# Altium PCB ATRACK_KP_V1.PcbDoc (part 1 of 2)
Units mm, origin at the board's own origin, x right, y up, seen from the top; angles counter-clockwise.
Board outline 132 x 70 mm, 2 copper layers (TopLayer, BottomLayer); 246 components, 174 nets, 752 pads, 172 vias.
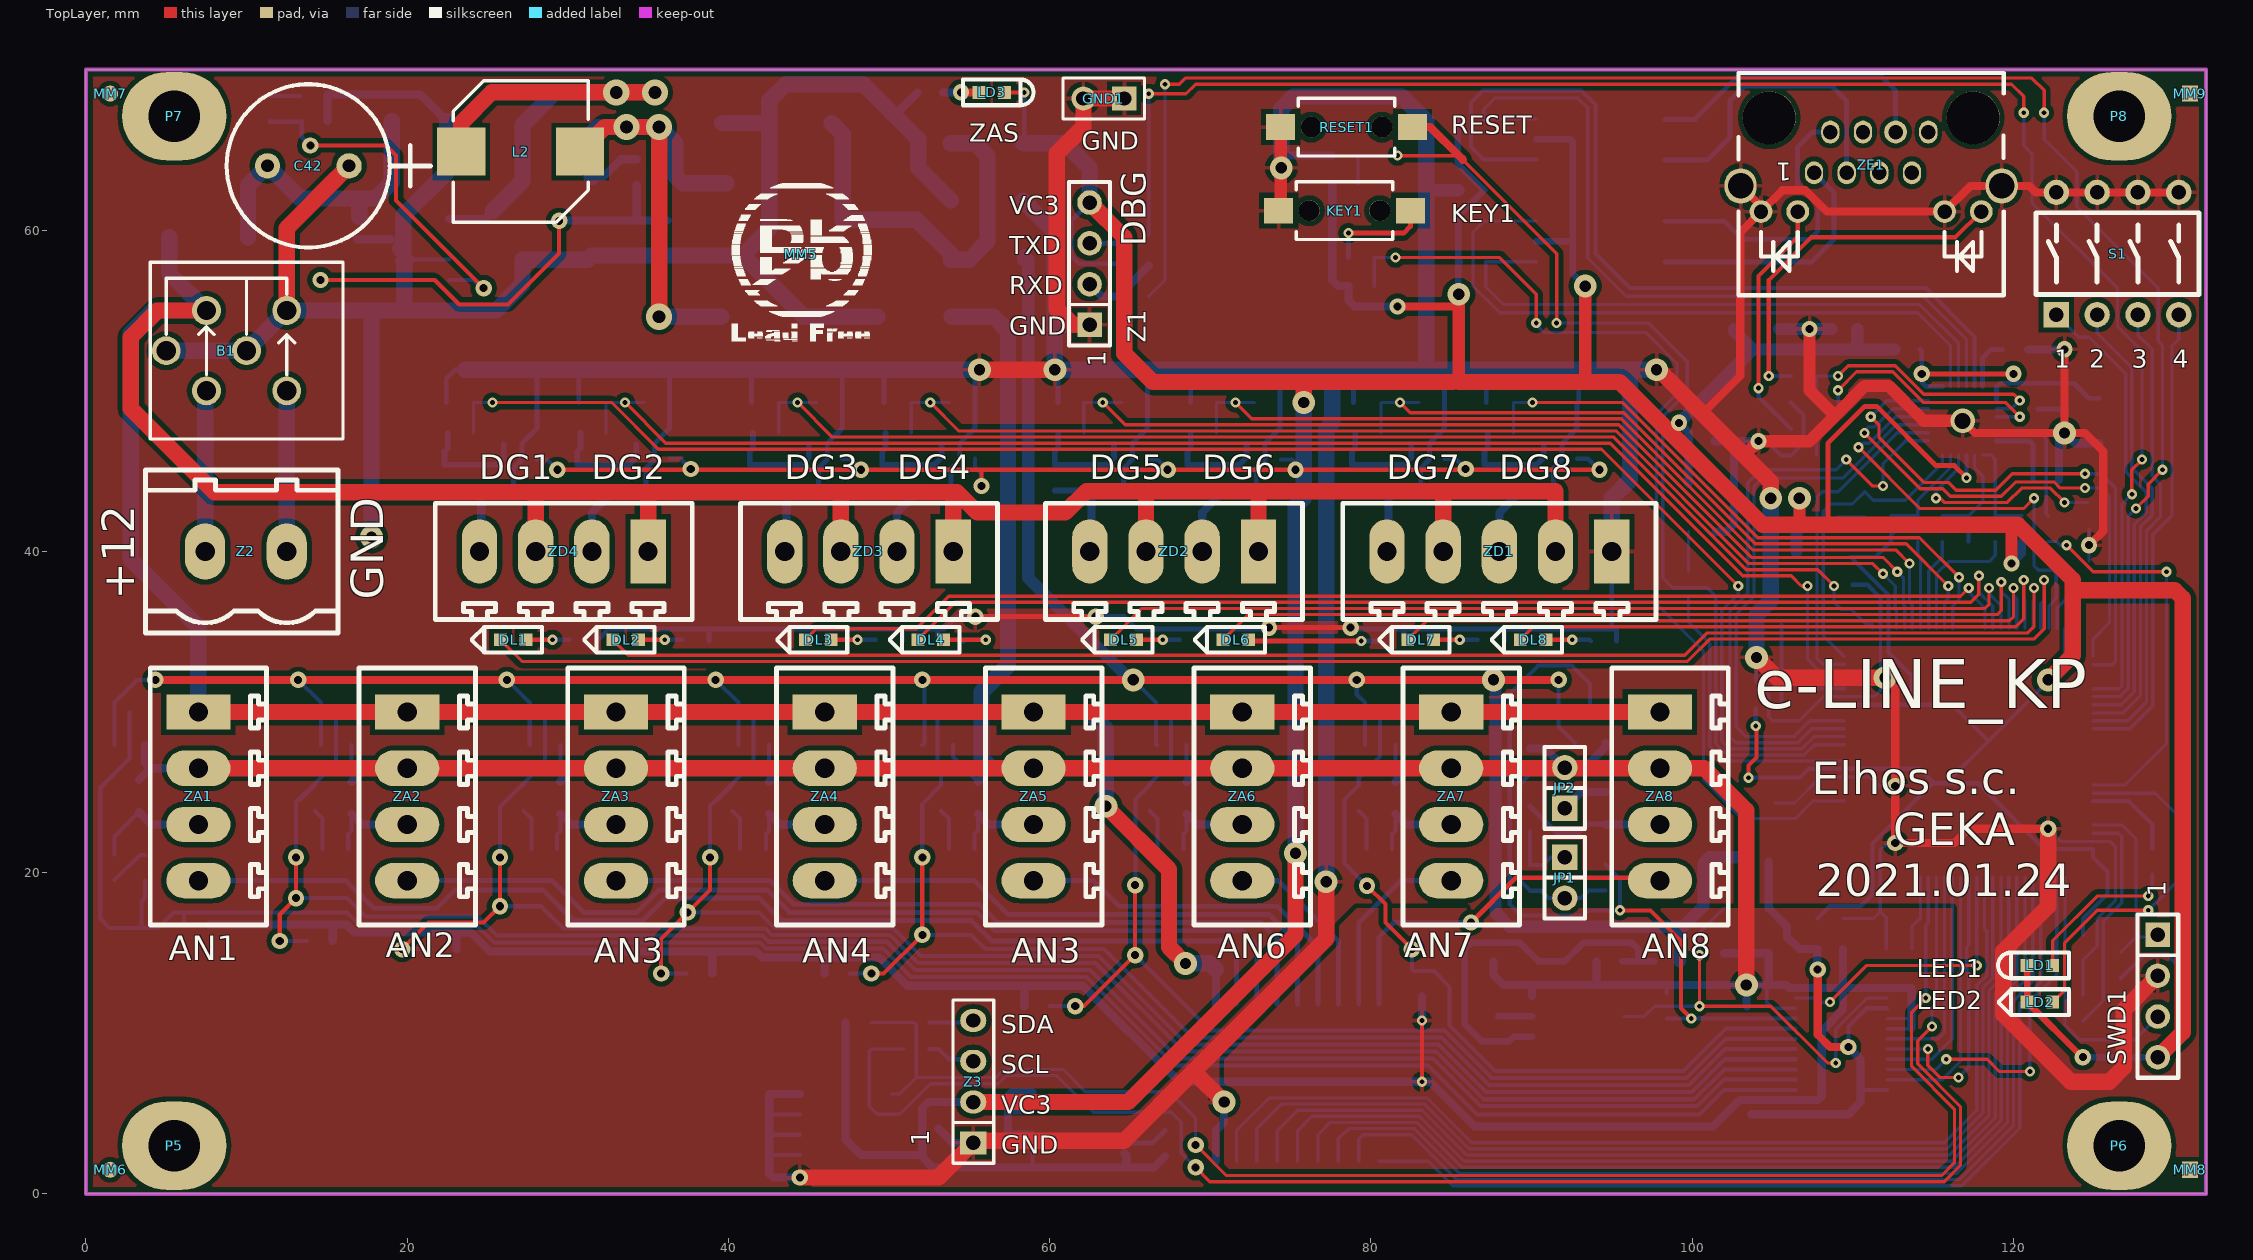
[diagram p0: TopLayer view]
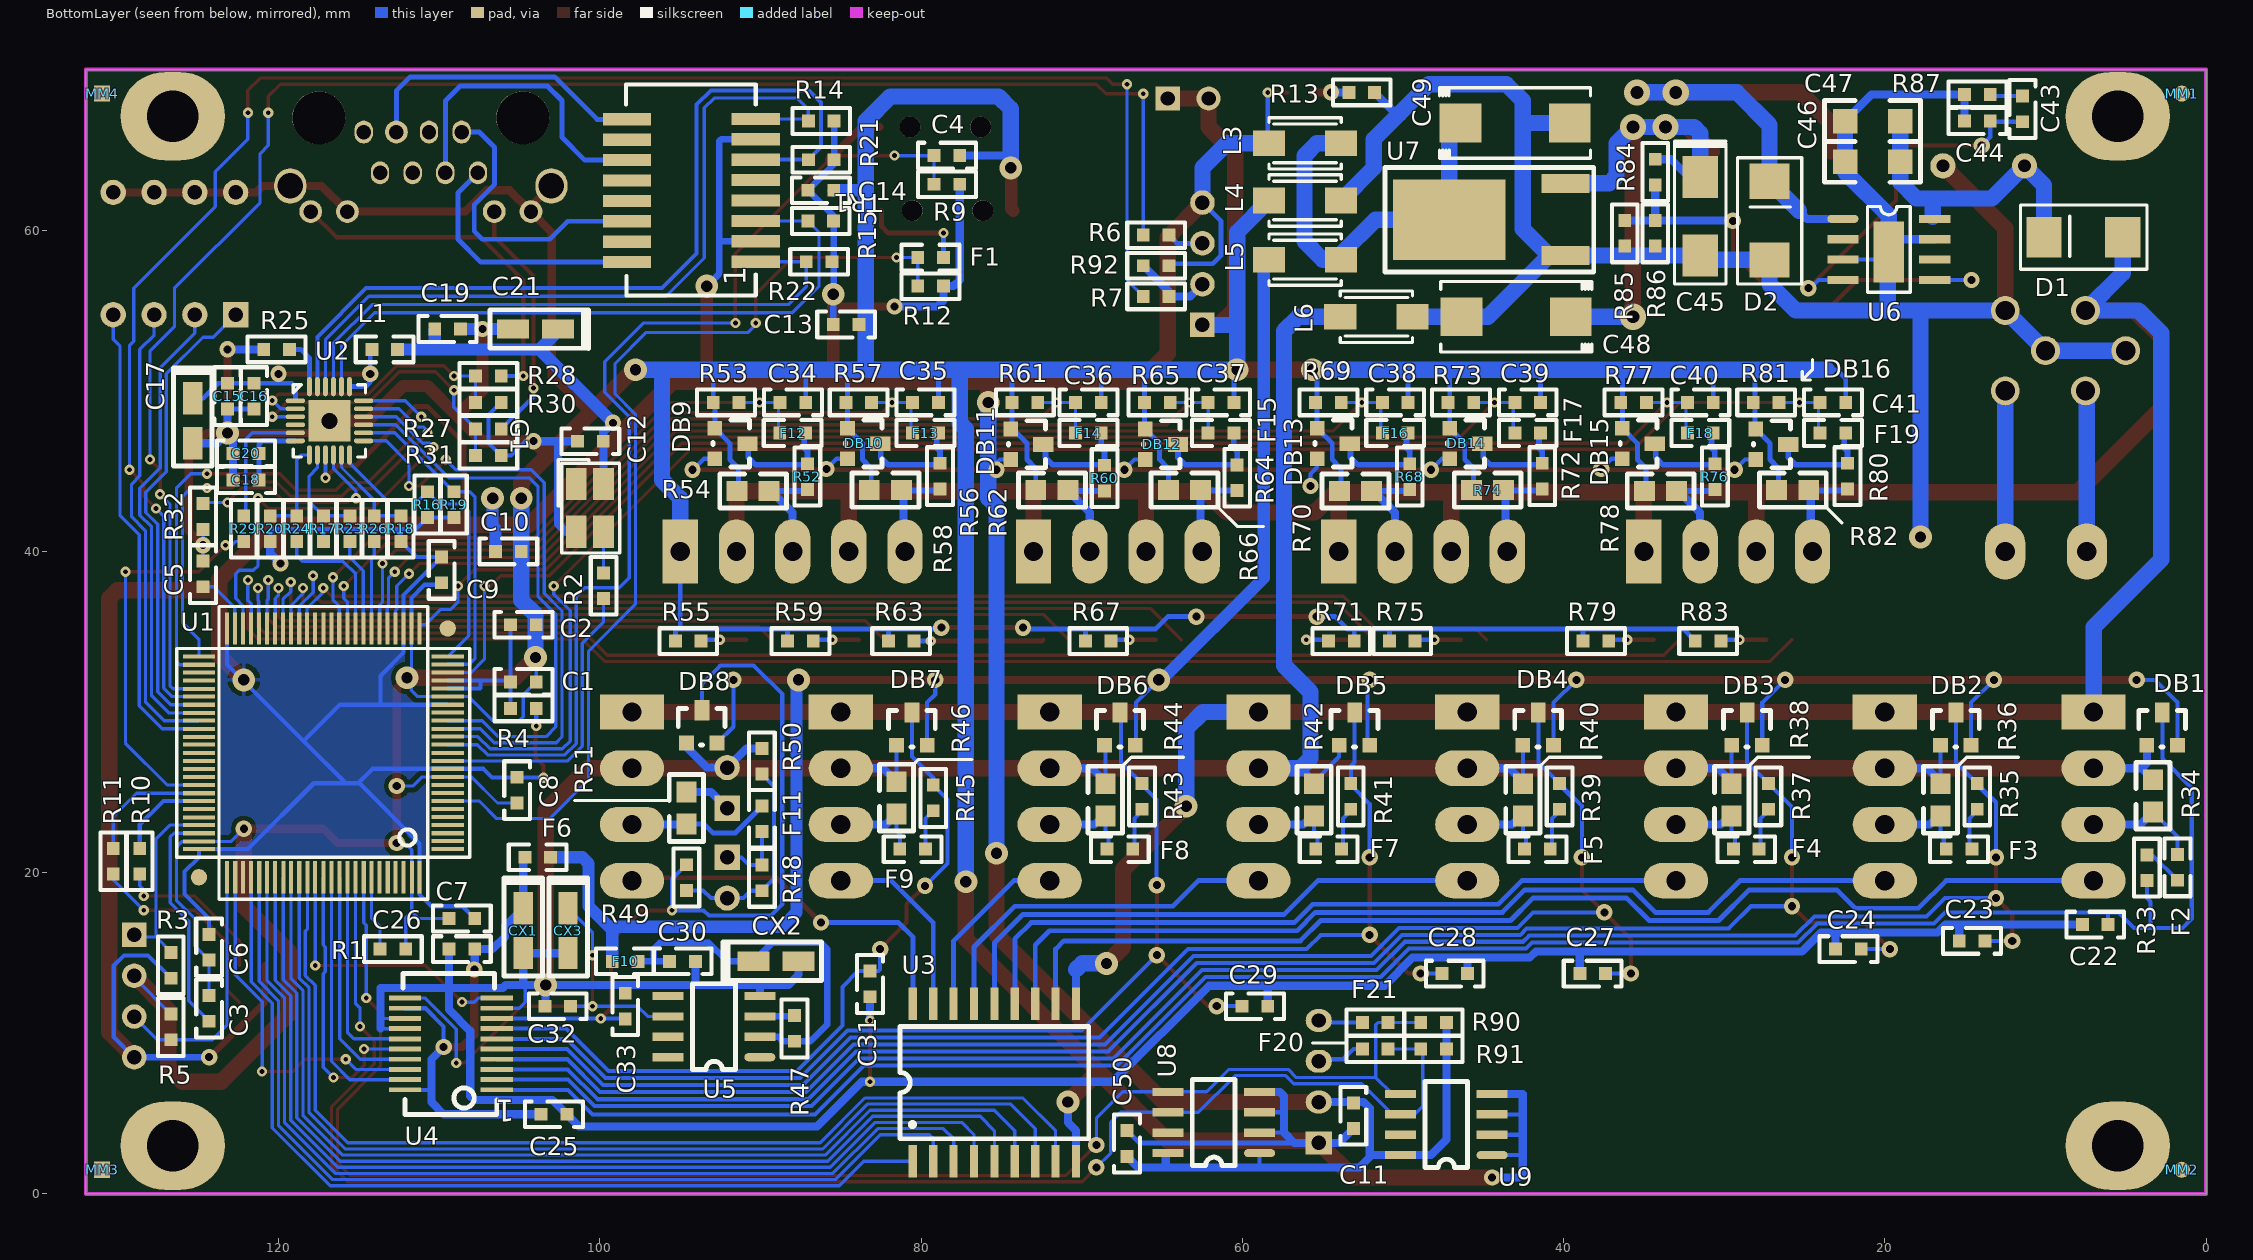
[diagram p1: BottomLayer view, seen from below]

## Layer stack, top to bottom
TopLayer: signal copper 0.0356
Dielectric: core 0.32, FR-4, Dk 4.8
BottomLayer: signal copper 0.0356

## Board outline
0,0 0,70 132,70 132,0

## Design rules (kind name [scope] priority, off if disabled: settings)
Clearance Clearance_Polygon [inPolygon] p1: gap=0.305
Clearance Clearance_1 [not (inPolygon)] p2: gap=0.178
Clearance Clearance_Mocowanie [(InComponentClass('Mocowanie'))] p3: gap=0.508
DiffPairsRouting [All] p1: maxlimit=0.254 minlimit=0.254 mostfreqgap=0.254 maxuncoupledlength=12.7
FabricationTestPointUsage TestPointUsage [All] p1: valid=0 allowmultiple=FALSE
FabricationTestpoint Testpoint [All] p1: side=3 testpointundercomponent=TRUE minsize=1.016 maxsize=2.54 preferedsize=1.524 minholesize=0.508 maxholesize=1.016 preferedholesize=0.813 testpointgrid=0.025 allowsidetop=TRUE allowsidebottom=TRUE usegrid=TRUE gridtolerance=0
HoleSize [All] p1: absolutevalues=TRUE maxlimit=5.08 minlimit=0.3 maxpercent=80.000 minpercent=20.000
MatchedLengths "Schematic Matched Net Lengths_1" [InNet('TD_P')] p1: tolerance=7.62 checknetsindiffpair=TRUE checkdiffpairvsdiffpair=TRUE checkothers=TRUE
MatchedLengths "Schematic Matched Net Lengths" [InNet('RD_N')] p2: tolerance=7.62 checknetsindiffpair=TRUE checkdiffpairvsdiffpair=TRUE checkothers=TRUE
PolygonConnect [All] p1: connectstyle=Relief reliefconductorwidth=0.254 reliefentries=4 polygonreliefangle="90 Angle"
RoutingVias [All] p1: holewidth=0.508 width=1.016 viastyle="Through Hole" minholewidth=0.305 minwidth=0.635 maxholewidth=1.27 maxwidth=2.54
SilkscreenOverComponentPads [All] p1: minsilkscreentomaskgap=0.254
SolderMaskExpansion [All] p1: expansion=0.102
Width [All] p1: maxlimit=5.08 minlimit=0.203 preferedwidth=0.508
23 further rules are at their usual default settings.

## Classes and differential pairs
net class ETHERNET: ERX+ ERX- ETH9 ETH10 ETH11 ETH12 ETH13 ETH14 ETH15 ETH16 ETX+ ETX-
differential pair TD: +TD_P -TD_N
differential pair RD: +RD_P -RD_N

## Components (designator, comment, footprint, x,y, rotation, side; value= is the part's Value field where it differs from the comment)
B1 "BNX002" BNX002 16,58 r0 top
C1 "2u2" 0603C 105.664,31.877 r0 bottom
C2 "100n" 0603C 105.664,35.433 r0 bottom
C3 "2u2" 0603C 124.333,12.446 r90 bottom
C4 "10n" 0603C 79.297,64.643 r0 bottom
C5 "2u2" 0603C 124.714,39.497 r90 bottom
C6 "100n" 0603C 124.333,16.256 r90 bottom
C7 "100n" 0603C 107.696,17.145 r180 bottom
C8 "100n" 0603C 105.156,26.035 r90 bottom
C9 "100n" 0603C 109.855,39.751 r90 bottom
C10 "100n" 0603C 106.602,40 r0 bottom
C11 "100n" 0603C 53.086,5.764 r90 bottom
C12 "100n" 0603C 99.695,46.863 r180 bottom
C13 "100nF" 0603C 83.771,54.129 r180 bottom
C14 "100nF" 0603C 85.344,62.484 r180 bottom
C15 "100nF" 0603C 123.19,48.768 r270 bottom
C16 "100nF" 0603C 121.539,48.768 r270 bottom
C17 "10uF/6v3" CAP_A 125.349,46.736 r90 bottom
C18 "470pF" 0603C 122.936,44.45 r0 bottom
C19 "100nF" 0603C 108.585,53.848 r180 bottom
C20 "2.2uF" 0603C 122.936,46.101 r0 bottom
C21 "10uF/6v3" CAP_A 105.41,53.848 r180 bottom
C22 "100n" 0603C 5.996,16.764 r180 bottom
C23 "100n" 0603C 13.667,15.748 r180 bottom
C24 "100n" 0603C 21.363,15.24 r180 bottom
C25 "100n" 0603C 103.759,4.953 r0 bottom
C26 "100n" 0603C 107.696,15.24 r180 bottom
C27 "100n" 0603C 37.289,13.716 r180 bottom
C28 "100n" 0603C 47.674,13.716 r0 bottom
C29 "100n" 0603C 60.12,11.684 r0 bottom
C30 "100n" 0603C 95.758,14.478 r0 bottom
C31 "100n" 0603C 83.185,13.97 r90 bottom
C32 "100n" 0603C 101.727,11.684 r180 bottom
C33 "100n" 0603C 98.425,10.795 r270 bottom
C34 "100n" 0603C 88.885,49.276 r0 bottom
C35 "100n" 0603C 80.63,49.276 r0 bottom
C36 "100n" 0603C 70.485,49.276 r0 bottom
C37 "100n" 0603C 62.23,49.276 r0 bottom
C38 "100n" 0603C 51.385,49.276 r0 bottom
C39 "100n" 0603C 43.13,49.276 r0 bottom
C40 "100n" 0603C 32.385,49.276 r0 bottom
C41 "100n" 0603C 24.13,49.276 r0 bottom
C42 "1000uF/25V" RB-.2/.4 16.383,64.008 r0 top
C43 "22nF" 0603C 11.43,68.453 r90 bottom
C44 "470p" 0603C 13.335,66.802 r180 bottom
C45 "100uF/6v3" CAP_C 31.496,58.42 r90 bottom
C46 "4u7/25V" 1206 22.479,64.262 r180 bottom
C47 "4u7/25V" 1206 22.479,66.802 r180 bottom
C48 "470uF/16V" CAP_D 46.355,54.61 r180 bottom
C49 "470uF/16V" CAP_D 39.624,66.675 r0 bottom
C50 "100nF" 0603C 67.183,2.237 r270 bottom
CX1 "10u" CAP_A 104.775,14.986 r90 bottom
CX2 "10u" CAP_A 87.63,14.478 r0 bottom
CX3 "10u" CAP_A 101.981,14.986 r90 bottom
D1 "MB1" RD5 5.588,59.563 r180 bottom
D2 "SK26" RD5 27.178,58.547 r270 bottom
DB1 "BAV99" SOT-23 3.683,27.94 r0 bottom
DB2 "BAV99" SOT-23 16.534,27.94 r0 bottom
DB3 "BAV99" SOT-23 29.534,27.94 r0 bottom
DB4 "BAV99" SOT-23 42.534,27.94 r0 bottom
DB5 "BAV99" SOT-23 53.975,27.94 r0 bottom
DB6 "BAV99" SOT-23 68.58,27.94 r0 bottom
DB7 "BAV99" SOT-23 81.534,27.94 r0 bottom
DB8 "BAV99" SOT-23 94.615,28.067 r0 bottom
DB9 "BAV99" SOT-23 92.844,47.674 r90 bottom
DB10 "BAV99" SOT-23 84.589,47.674 r90 bottom
DB11 "BAV99" SOT-23 74.422,47.625 r90 bottom
DB12 "BAV99" SOT-23 66.04,47.625 r90 bottom
DB13 "BAV99" SOT-23 55.344,47.674 r90 bottom
DB14 "BAV99" SOT-23 47.089,47.674 r90 bottom
DB15 "BAV99" SOT-23 36.344,47.674 r90 bottom
DB16 "BAV99" SOT-23 28.04,47.625 r90 bottom
DL1 "" 0603DR 27.5,34.5 r0 top locked
DL2 "" 0603DR 34.5,34.5 r0 top locked
DL3 "" 0603DR 46.5,34.5 r0 top locked
DL4 "" 0603DR 53.5,34.5 r0 top locked
DL5 "" 0603DR 65.5,34.5 r0 top locked
DL6 "" 0603DR 72.5,34.5 r0 top locked
DL7 "" 0603DR 84,34.5 r0 top locked
DL8 "" 0603DR 91,34.5 r0 top locked
F1 "BLM18BB141SN1D" 0603L 78.513,58.293 r0 bottom
F2 "BLM21A102SPT" 0603L 1.778,19.431 r90 bottom
F3 "BLM21A102SPT" 0603L 14.478,21.463 r0 bottom
F4 "BLM21A102SPT" 0603L 27.729,21.463 r0 bottom
F5 "BLM21A102SPT" 0603L 40.729,21.463 r0 bottom
F6 "BLM21A102SPT" 0603L 104.775,20.955 r180 bottom
F7 "BLM21A102SPT" 0603L 53.729,21.463 r0 bottom
F8 "BLM21A102SPT" 0603L 66.729,21.463 r0 bottom
F9 "BLM21A102SPT" 0603L 79.629,21.463 r0 bottom
F10 "BLM21A102SPT" 0603L 97.536,14.478 r0 bottom
F11 "BLM21A102SPT" 0603L 89.916,22.452 r90 bottom
F12 "BLM21A102SPT" 0603L 88.9,47.371 r180 bottom
F13 "BLM21A102SPT" 0603L 80.63,47.371 r180 bottom
F14 "BLM21A102SPT" 0603L 70.485,47.371 r180 bottom
F15 "BLM21A102SPT" 0603L 62.23,47.371 r180 bottom
F16 "BLM21A102SPT" 0603L 51.385,47.371 r180 bottom
F17 "BLM21A102SPT" 0603L 43.13,47.371 r180 bottom
F18 "BLM21A102SPT" 0603L 32.385,47.371 r180 bottom
F19 "BLM21A102SPT" 0603L 24.13,47.371 r180 bottom
F20 "BLM18BB141SN1D" 0603R 52.627,9.017 r0 bottom
F21 "BLM18BB141SN1D" 0603R 52.627,10.668 r0 bottom
G1 "CFPS-72-8M" GEN_SMD1_1 101.473,44.196 r90 bottom
GND1 "Header 2" HDR1X2 64.643,68.199 r180 top
JP1 "CON2" SIP2 92.075,20.955 r270 top
JP2 "CON2" SIP2 92.075,24.003 r90 top
KEY1 "SW-PB" DTSM31N_2 78.359,61.214 r270 top
L1 "BLM18PG121SN1D" 0603L 114.3,52.578 r180 bottom
L2 "DER0705-15" DER0705_1 23.368,64.897 r0 top
L3 "1210F-220K-01" IND_1812 53.848,65.405 r0 bottom
L4 "1210F-220K-01" IND_1812 53.848,61.849 r0 bottom
L5 "1210F-220K-01" IND_1812 53.848,58.166 r0 bottom
L6 "1210F-220K-01" IND_1812 49.403,54.61 r0 bottom
LD1 "" 0603DG 122.555,14.224 r0 top
LD2 "" 0603DR 122.555,11.938 r0 top
LD3 "" 0603DG 55.499,68.58 r180 top
MM1 "" REF_CIR 1.5,68.5 r180 bottom
MM2 "" REF_CIR 1.5,1.5 r270 bottom
MM3 "" REF_SQR 131,1.5 r270 bottom
MM4 "" REF_SQR 131,68.5 r270 bottom
MM5 "" PB_FREE_GRAF 44.5,58.5 r0 top
MM6 "" REF_CIR 1.5,1.5 r90 top
MM7 "" REF_CIR 1.5,68.5 r90 top
MM8 "" REF_SQR 131,1.5 r90 top
MM9 "" REF_SQR 131,68.5 r90 top
P5 "PP" PP_SR 5.5,3 r0 top
P6 "PP" PP_SR 126.6,3 r0 top
P7 "PP" PP_SR 5.5,67.1 r0 top
P8 "PP" PP_SR 126.6,67.1 r0 top
R1 "10k" 0603R 113.792,15.24 r0 bottom
R2 "33R" 0603R 99.771,38.762 r90 bottom
R3 "10k" 0603R 126.714,13.326 r270 bottom
R4 "100R" 0603R 105.664,30.226 r0 bottom
R5 "10k" 0603R 126.714,11.294 r90 bottom
R6 "33R" 0603R 64.467,59.69 r180 bottom
R7 "33R" 0603R 64.467,55.88 r180 bottom
R9 "10k" 0603R 77.497,62.865 r180 bottom
R10 "4k7" 0603R 128.651,19.812 r270 bottom
R11 "4k7" 0603R 130.302,19.812 r270 bottom
R12 "10k" 0603R 80.313,56.515 r0 bottom
R13 "4k7" 0603R 53.467,68.58 r0 bottom
R14 "50R" 0603R 87.122,66.802 r0 bottom
R15 "50R" 0603R 87.153,60.574 r0 bottom
R16 "4k7" 0603R 110.744,43.815 r90 bottom
R17 "4k7" 0603R 117.221,40.513 r270 bottom
R18 "4k7" 0603R 112.395,40.513 r270 bottom
R19 "4k7" 0603R 109.093,43.815 r90 bottom
R20 "4k7" 0603R 120.523,40.513 r270 bottom
R21 "50R" 0603R 87.122,64.389 r0 bottom
R22 "50R" 0603R 87.249,58.039 r0 bottom
R23 "33R" 0603R 115.57,40.513 r270 bottom
R24 "33R" 0603R 118.872,40.513 r270 bottom
R25 "12k1" 0603R 121.031,52.578 r0 bottom
R26 "33R" 0603R 114.046,40.513 r270 bottom
R27 "1k" 0603R 106.045,47.625 r180 bottom
R28 "1k" 0603R 106.045,50.927 r180 bottom
R29 "33R" 0603R 122.174,40.513 r270 bottom
R30 "10k" 0603R 106.045,49.276 r180 bottom
R31 "10k" 0603R 106.045,45.974 r180 bottom
R32 "4k7" 0603R 124.714,41.275 r270 bottom
R33 "100R" 0603R 3.683,21.209 r90 bottom
R34 "270R" 0805R 3.302,25.908 r270 bottom
R35 "100R" 0603R 14.248,23.849 r270 bottom
R36 "270R" 0805R 16.534,25.656 r270 bottom
R37 "100R" 0603R 27.248,23.849 r270 bottom
R38 "270R" 0805R 29.534,25.656 r270 bottom
R39 "100R" 0603R 40.248,23.849 r270 bottom
R40 "270R" 0805R 42.534,25.656 r270 bottom
R41 "100R" 0603R 53.248,23.849 r270 bottom
R42 "270R" 0805R 55.534,25.656 r270 bottom
R43 "100R" 0603R 66.248,23.849 r270 bottom
R44 "270R" 0805R 68.534,25.656 r270 bottom
R45 "100R" 0603R 79.248,23.749 r270 bottom
R46 "270R" 0805R 81.534,25.781 r270 bottom
R47 "10k" 0603R 87.884,9.398 r270 bottom
R48 "2k7" 0603R 89.916,20.574 r90 bottom
R49 "100R" 0603R 94.615,18.796 r270 bottom
R50 "3k3" 0603R 89.916,26.035 r270 bottom
R51 "270R" 0805R 94.615,25.146 r270 bottom
R52 "10k" 0603R 87.08,43.761 r270 bottom
R53 "6k8" 0603R 91.244,49.276 r180 bottom
R54 "1k5" 0805R 89.337,43.761 r0 bottom
R55 "1k5" 0603R 93.599,34.417 r180 bottom
R56 "10k" 0603R 78.825,43.788 r270 bottom
R57 "6k8" 0603R 82.989,49.276 r180 bottom
R58 "1k5" 0805R 81.109,43.815 r0 bottom
R59 "1k5" 0603R 86.614,34.417 r180 bottom
R60 "10k" 0603R 68.58,43.661 r270 bottom
R61 "6k8" 0603R 72.644,49.276 r180 bottom
R62 "1k5" 0805R 70.739,43.815 r0 bottom
R63 "1k5" 0603R 80.342,34.417 r180 bottom
R64 "10k" 0603R 60.325,43.688 r270 bottom
R65 "6k8" 0603R 64.389,49.276 r180 bottom
R66 "1k5" 0805R 62.484,43.815 r0 bottom
R67 "1k5" 0603R 68.072,34.417 r180 bottom
R68 "10k" 0603R 49.58,43.761 r270 bottom
R69 "6k8" 0603R 53.744,49.276 r180 bottom
R70 "1k5" 0805R 51.837,43.761 r0 bottom
R71 "1k5" 0603R 54.737,34.417 r0 bottom
R72 "10k" 0603R 41.325,43.788 r270 bottom
R73 "6k8" 0603R 45.489,49.276 r180 bottom
R74 "1k5" 0805R 43.609,43.815 r0 bottom
R75 "1k5" 0603R 49.149,34.417 r180 bottom
R76 "10k" 0603R 30.58,43.761 r270 bottom
R77 "6k8" 0603R 34.744,49.276 r180 bottom
R78 "1k5" 0805R 32.837,43.761 r0 bottom
R79 "1k5" 0603R 37.084,34.417 r180 bottom
R80 "10k" 0603R 22.325,43.788 r270 bottom
R81 "6k8" 0603R 26.489,49.276 r180 bottom
R82 "1k5" 0805R 24.609,43.815 r0 bottom
R83 "1k5" 0603R 30.099,34.417 r180 bottom
R84 "10k" 0603R 34.29,64.516 r90 bottom
R85 "3k3" 0603R 36.195,60.706 r90 bottom
R86 "100k" 0603R 34.29,60.706 r90 bottom
R87 "4k7" 0603R 13.335,68.453 r180 bottom
R90 "4k7" 0603R 47.195,10.668 r180 bottom
R91 "4k7" 0603R 47.195,9.017 r180 bottom
R92 "10k" 0603R 66.267,57.785 r0 bottom
RESET1 "SW-PB" DTSM31N_2 78.486,66.421 r90 top
S1 "SW DIP-4" DIP8-SW 122.682,54.737 r90 top
SWD1 "ST-LINK" PIN4 129,16.12 r270 top
TR1 "H1102NL" H1102 90.297,58.039 r270 bottom
U1 "STM32F427VGT6" VQ100_2 109.474,21.463 r90 bottom
U2 "LAN8742A-CZ-TR" QFN24_LAN 116.84,48.133 r180 bottom
U3 "ULN2803A" SO-18 80.518,2.032 r180 bottom
U4 "ADS8344" TSSOP20 106.426,6.477 r90 bottom
U5 "REF193GS" SO8 90.043,8.509 r180 bottom
U6 "L5973D_2" SO8_M 22.606,60.706 r270 bottom
U7 "LD1117V33" DPAK 39.878,58.42 r90 bottom
U8 "FM24CL64B-GTR" SO8 58.928,2.54 r180 bottom
U9 "24AA256UID-I/SN" SO8 44.45,2.413 r180 bottom
Z1 "DBG" PIN4 62.484,54.102 r90 top
Z2 "CON2" ARC-2-5.08-A1 12.5,40 r180 top
Z3 "WYSW" SSD1306_PR 53.975,6.985 r0 top locked
ZA1 "ZL-4" ARC-4-3.5-TYCO-2 7,30 r270 top locked
ZA2 "ZL-4" ARC-4-3.5-TYCO-2 20,30 r270 top locked
ZA3 "ZL-4" ARC-4-3.5-TYCO-2 33,30 r270 top locked
ZA4 "ZL-4" ARC-4-3.5-TYCO-2 46,30 r270 top locked
ZA5 "ZL-4" ARC-4-3.5-TYCO-2 59,30 r270 top locked
ZA6 "ZL-4" ARC-4-3.5-TYCO-2 72,30 r270 top locked
ZA7 "ZL-4" ARC-4-3.5-TYCO-2 85,30 r270 top locked
ZA8 "ZL-4" ARC-4-3.5-TYCO-2 98,30 r270 top locked
ZD1 "ZL-5" ARC-5-3.5-TYCO-2 95,40 r180 top locked
ZD2 "ZL-4" ARC-4-3.5-TYCO-2 73,40 r180 top locked
ZD3 "ZL-4" ARC-4-3.5-TYCO-2 54,40 r180 top locked
ZD4 "ZL-4" ARC-4-3.5-TYCO-2 35,40 r180 top locked
ZE1 "WURTH 615 008 137 421" RJHSE-3381 117.5,67 r180 top locked

## Footprints (in the part's own frame and the unit in brackets; to place one, negate y for a bottom-side part, rotate by r counter-clockwise, add the part's x,y. Pads: shape width x height; smd on the part's side, far side on the other; paste and mask are expansions set on the pad)
0603C [mm]
  rect 0.8x0.8 smd: 1(-0.1,0) 2(-1.7,0)
  silkscreen extent -2.7,-0.8 0.9,0.8
0603DG [mm]
  rect 0.8x0.8 smd: A(-1.7,0) K(-0.1,0)
  silkscreen extent -3.5,-0.8 0.9,0.8
0603DR [mm]
  rect 0.8x0.8 smd: A(-1.7,0) K(-0.1,0)
  silkscreen extent -3.45,-0.8 0.9,0.8
0603L [mm]
  rect 0.8x0.8 smd: 1(0.1,0) 2(1.7,0)
  silkscreen extent -0.9,-0.8 2.7,0.8
0603R [mm]
  rect 0.8x0.8 smd: 1(-0.1,0) 2(-1.7,0)
  silkscreen extent -2.7,-0.8 0.9,0.8
0805R [mm]
  rect 1.3x1.25 smd: 1(0.125,0) 2(2.125,0)
  silkscreen extent -0.97,-1.07 3.2,1.07
1206 [mil]
  rect 60x60 smd: 1(0.13,-0.21) 2(135.13,-0.21)
  silkscreen extent -50,-50 185,50
ARC-2-5.08-A1 [mm]
  oval 2.5x3.5 hole 1.2: 1(0,0) 2(5.08,0)
  silkscreen extent -3.2,-5.08 8.79,5.08
ARC-4-3.5-TYCO-2 [mm]
  rect 2.2x4 hole 1.2: 1(0,0)
  oval 2.2x4 hole 1.2: 2(3.5,0) 3(7,0) 4(10.5,0)
  silkscreen extent -2.75,-3 13.25,4.25
ARC-5-3.5-TYCO-2 [mm]
  rect 2.2x4 hole 1.2: 1(0,0)
  oval 2.2x4 hole 1.2: 2(3.5,0) 3(7,0) 4(10.5,0) 5(14,0)
  silkscreen extent -2.75,-3 16.75,4.25
BNX002 [mm]
  round 1.8 hole 1.2: B(-8.5,-8) CB(-8.5,-3) CG1(-3.5,-3) CG2(-6,-5.5) CG3(-11,-5.5) PSG(-3.5,-8)
  silkscreen extent -12,-11 0,0
CAP_A [mm]
  rect 2x1.2 smd: 1(0,0) 2(2.8,0)
  silkscreen extent -1.42,-1.21 4.7,1.2
CAP_C [mm]
  rect 2.6x2.2 smd: 1(0,0) 2(4.9,0)
  silkscreen extent -1.78,-1.6 7.11,1.6
CAP_D [mm]
  rect 2.6x2.4 smd: 1(0,0) 2(6.8,0)
  silkscreen extent -1.3,-2.2 8.1,2.2
DER0705_1 [mm]
  rect 3x3 smd: 1(0,0) 2(7.4,0)
  silkscreen extent -0.5,-4.4 7.9,4.4
DIP8-SW [mil]
  rect 62x62 hole 35.43: 1(0,0)
  round 62 hole 35.43: 2(0,-100) 3(0,-200) 4(0,-300) 5(300,-300) 6(300,-200) 7(300,-100) 8(300,0)
  silkscreen extent 50,-350 250,50
DPAK [mil]
  rect 47x118 smd: 1(0,0) 3(177,0)
  rect 197x276 smd: 2(88,285)
  silkscreen extent -40,-69 216,443
DTSM31N_2 [mm]
  round 1.3 hole 1.3 mask+0: 0(0,2.2) 0(0,-2.2)
  rect 1.6x1.8 smd: 1(0,4.1) 2(0,-4.1)
  silkscreen extent -1.8,-3 1.8,3
GEN_SMD1_1 [mm]
  rect 2x1.3 smd: 1(0,0) 2(-2.972,0) 3(-2.972,-1.702) 4(0,-1.702)
  silkscreen extent -4.3,-2.7 1.52,1.12
H1102 [mm]
  rect 0.76x3 smd: 1(0,0) 2(-1.27,0) 3(-2.54,0) 4(-3.81,0) 5(-5.08,0) 6(-6.35,0) 7(-7.62,0) 8(-8.89,0) 9(-8.865,-8.026) 10(-7.595,-8.026) 11(-6.325,-8.026) 12(-5.055,-8.026) 13(-3.785,-8.026) 14(-2.515,-8.026) 15(-1.245,-8.026) 16(0.025,-8.026)
  silkscreen extent -11.02,-8.08 2.11,0
HDR1X2 [mm] "Connector; Header; 2 Position"
  rect 1.5x1.5 hole 0.9: 1(0,0)
  round 1.5 hole 0.9: 2(2.54,0)
  silkscreen extent -1.27,-1.27 3.81,1.27
IND_1812 [mm]
  rect 2x1.6 smd: 1(0,0) 2(4.5,0)
  silkscreen extent 0,-1.6 4.5,1.6
PB_FREE_GRAF [mm]
  silkscreen extent -4.29,-5.46 4.43,4.59
PIN4 [mil]
  rect 60x60 hole 35.43: 1(0,0)
  round 60 hole 35.43: 2(100,0) 3(200,0) 4(300,0)
  silkscreen extent -50,-50 350,50
PP_SR [mm]
  oval 6.5x5.5 hole 3.2: 1(0,0)
QFN24_LAN [mm]
  oval 1.2x0.3 smd mask+0.152: 1(-2.125,1.25) 2(-2.125,0.75) 3(-2.125,0.25) 4(-2.125,-0.25) 5(-2.125,-0.75) 6(-2.125,-1.25) 13(2.125,-1.25) 14(2.125,-0.75) 15(2.125,-0.25) 16(2.125,0.25) 17(2.125,0.75) 18(2.125,1.25)
  oval 0.3x1.2 smd mask+0.152: 7(-1.25,-2.125) 8(-0.75,-2.125) 9(-0.25,-2.125) 10(0.25,-2.125) 11(0.75,-2.125) 12(1.25,-2.125) 19(1.25,2.125) 20(0.75,2.125) 21(0.25,2.125) 22(-0.25,2.125) 23(-0.75,2.125) 24(-1.25,2.125)
  rect 2.6x2.6 smd mask+0.152: 25(0,0)
  silkscreen extent -2.25,-2.25 2.25,2.25
RB-.2/.4 [mil]
  round 62 hole 31.5: 1(0,0) 2(-200,0)
  silkscreen extent -300,-200 200,200
RD5 [mm]
  rect 2.2x2.5 smd: A(0.4,0) K(-4.5,0)
  silkscreen extent -5.97,-2 1.91,2
REF_CIR [mm]
  round 1 smd paste-0.5 mask+0.5: 0(0,0)
REF_SQR [mm]
  rect 1x1 smd paste-0.5 mask+0.5: ""(0,0)
RJHSE-3381 [mil]
  round 129.92 hole 129.92: 0(0,0) 0(500,0)
  oval 45x56 hole 35.43: 1(390,135) 2(350,35) 3(310,135) 4(270,35) 5(230,135) 7(150,135) 8(110,35)
  round 56 hole 35.43: 6(190,35) 9(520,230) 10(430,230) 11(70,230) 12(-20,230)
  oval 78.74x86.61 hole 62.99 mask+8: G1(-70,167) G2(570,167)
  silkscreen extent -75,-110 575,435
SIP2 [mil]
  rect 62x62 hole 35.43: 1(0,0)
  round 62 hole 35.43: 2(100,0)
  silkscreen extent -50,-50 150,50
SO8 [mil]
  oval 76x20 smd: 1(0,0)
  rect 76x20 smd: 2(0,50) 3(0,100) 4(0,150) 5(-225,150) 6(-225,100) 7(-225,50) 8(-225,0)
  silkscreen extent -165,-30 -60,180
SO8_M [mil]
  oval 20x76 smd: 1(0,0)
  rect 20x76 smd: 2(50,0) 3(100,0) 4(150,0) 5(150,225) 6(100,225) 7(50,225) 8(0,225)
  rect 150x75 smd: 9(81,112)
  silkscreen extent -30,60 180,165
SO-18 [mil]
  rect 20x80 smd: 1(0,0) 2(50,0) 3(100,0) 4(150,0) 5(200,0) 6(250,0) 7(300,0) 8(350,0) 9(400,0) 10(400,385.83) 11(350,385.83) 12(300,385.83) 13(250,385.83) 14(200,385.83) 15(150,385.83) 16(100,385.83) 17(50,385.83) 18(0,385.83)
  silkscreen extent -31,55 431,331
SOT-23 [mil]
  rect 36x36 smd: 1(0,0) 2(-75,0)
  rect 36x50 smd: 3(-38,-80)
  silkscreen extent -95,-85 20,5
SSD1306_PR [mil]
  rect 64x56 hole 35.43: 1(50,-150)
  oval 64x56 hole 35.43: 2(50,-50) 3(50,50) 4(50,150)
  silkscreen extent 0,-200 100,200
TSSOP20 [mm]
  rect 0.3x2 smd: 1(0,0) 2(0.635,0) 3(1.27,0) 4(1.905,0) 5(2.54,0) 6(3.175,0) 7(3.81,0) 8(4.445,0) 9(5.08,0) 10(5.715,0) 11(5.715,5.715) 12(5.08,5.715) 13(4.445,5.715) 14(3.81,5.715) 15(3.175,5.715) 16(2.54,5.715) 17(1.905,5.715) 18(1.27,5.715) 19(0.635,5.715) 20(0,5.715)
  silkscreen extent -1.52,0 7.24,5.84
VQ100_2 [mil]
  rect 10x79 smd mask+6: 1(0,0) 2(20,0) 3(39,0) 4(59,0) 5(79,0) 6(98,0) 7(118,0) 8(138,0) 9(157,0) 10(177,0) 11(197,0) 12(216,0) 13(236,0) 14(256,0) 15(276,0) 16(295,0) 17(315,0) 18(335,0) 19(354,0) 20(374,0) 21(394,0) 22(413,0) 23(433,0) 24(453,0) 25(472,0) 51(472,610) 52(452,610) 53(433,610) 54(413,610) 55(393,610) 56(374,610) 57(354,610) 58(334,610) 59(315,610) 60(295,610) 61(275,610) 62(256,610) 63(236,610) 64(216,610) 65(196,610) 66(177,610) 67(157,610) 68(137,610) 69(118,610) 70(98,610) 71(78,610) 72(59,610) 73(39,610) 74(19,610) 75(0,610)
  rect 79x10 smd mask+6: 26(541,69) 27(541,89) 28(541,108) 29(541,128) 30(541,148) 31(541,167) 32(541,187) 33(541,207) 34(541,226) 35(541,246) 36(541,266) 37(541,285) 38(541,305) 39(541,325) 40(541,345) 41(541,364) 42(541,384) 43(541,404) 44(541,423) 45(541,443) 46(541,463) 47(541,482) 48(541,502) 49(541,522) 50(541,541) 76(-69,541) 77(-69,521) 78(-69,502) 79(-69,482) 80(-69,462) 81(-69,443) 82(-69,423) 83(-69,403) 84(-69,384) 85(-69,364) 86(-69,344) 87(-69,325) 88(-69,305) 89(-69,285) 90(-69,265) 91(-69,246) 92(-69,226) 93(-69,206) 94(-69,187) 95(-69,167) 96(-69,147) 97(-69,128) 98(-69,108) 99(-69,88) 100(-69,69)
  round 40 smd: 101(541,0) 102(-68.9,610)
  silkscreen extent -123,-54 595,664

## Part data
C1 C2 C3 C4 C5 C6 C7 C8 C9 C10 C11 C12 C22 C23 C24 C27 C28 C29 C31 C33 C34 C35 C36 C37 C38 C39 C40 C41 C43 C44 C50: library part CAP, "Capacitor"
C13 C14 C15 C16 C19: library part Cap_100nF_X7R_10%_0402, "Capacitor,100nF,16V,X7R,10%,0402,YAGEO"
C17 C21: library part CapTantal
C18: library part Cap_470pF_X7R_10%_0402, "Capacitor,470pF,16V,X7R,10%,0402,YAGEO"
C20: library part Cap_1uF_X5R_10%_0603, "Capacitor,1uF,16V,X5R,10%,0603,YAGEO"
C25 C26 C30 C32 C46 C47: library part CAP
C42 C45 C48 C49 CX1 CX2 CX3: library part CAP_TANTAL_SMD, "KONDENSATOR ELEKTROLITYCZNY TANTALOWY SMD"
D1: library part Diode, "Default Diode"
D2: library part "DIODE SCHOTTKY", "Schottky Diode"
DB1 DB2 DB3 DB4 DB5 DB6 DB7 DB8 DB9 DB10 DB11 DB12 DB13 DB14 DB15 DB16: library part BAS70-04
DL1 DL2 DL3 DL4 DL5 DL6 DL7 DL8 LD1 LD2 LD3: library part LED
F1 F2 F3 F4 F5 F6 F7 F8 F9 F10 F11 F12 F13 F14 F15 F16 F17 F18 F19 F20 F21: library part KORALIK, "Koralik ferrytowy"
G1: library part GENER_SMD
GND1: "Header, 2-Pin"
JP1 JP2: library part JUMP2, "Connector"
L1: library part BEAD_120R_2A_0603, "Bead,120R,2A,0603,BLM18PG121SN1D,MURATA"
L2: library part CEWKA_1
L3 L4 L5 L6: library part "Inductor Iron", "Magnetic-Core Inductor"
MM1 MM2 MM3 MM4 MM5 MM6 MM7 MM8 MM9: library part MECH
R1 R2 R3 R4 R5 R6 R7 R9 R10 R11 R12 R13 R14 R15 R16 R17 R18 R19 R20 R21 R22 R23 R24 R25 R26 R27 R28 R29 R30 R31 R32 R33 R34 R35 R36 R37 R38 R39 R40 R41 R42 R43 R44 R45 R46 R47 R48 R49 R50 R51 R52 R53 R54 R55 R56 R57 R58 R59 R60 R61 R62 R63 R64 R65 R66 R67 R68 R69 R70 R71 R72 R73 R74 R75 R76 R77 R78 R79 R80 R81 R82 R83 R84 R85 R86 R87 R90 R91 R92: library part RES3
S1: "DIP Switch"
SWD1: library part SW_CON, "Header, 4-Pin"
U1: library part STM32F427_LQFP100
U2: "LAN8742A-CZ-TR - Small Footprint RMII 10/100 Ethernet, Transceiver with HP Auto-MDIX and flexPWR Technology SQFN-24"
U3: library part Pro31.tmp_ULN2803A_42
U5: library part REF19X
U8 U9: library part AT24C02
Z1: library part "Header 4", "Header, 4-Pin"
Z2: "Connector"
Z3: library part CON4, "Connector"
ZE1: library part RJ45GELED

## Via types
v1: diameter 0.635, hole 0.3, TopLayer to BottomLayer, tented both sides, 84 vias
v2: diameter 1.016, hole 0.5, TopLayer to BottomLayer, tented both sides, 60 vias
v3: diameter 1.422, hole 0.7, TopLayer to BottomLayer, tented both sides, 22 vias
v4: diameter 1.626, hole 0.8, TopLayer to BottomLayer, tented both sides, 5 vias
v5: diameter 1.524, hole 1, TopLayer to BottomLayer, tented both sides, 1 vias

## Nets (pads, with @x,y where several pads share a name; then routed paths per layer and width w, separated by ;. In a path a pad name is that pad's centre, name@x,y a point inside that pad or via, vN(x,y) a via of type N, cw(c..) or ccw(c..) an arc to the next point about the centre after c; other vN are vias at no path point)
/CS_AC: U1.77 U4.18 | length 22.3
  TopLayer w0.203: v1(115.824,8.382) 118.364,8.382 119.126,7.62 v1(121.031,7.62)
  BottomLayer w0.203: U4.18@112.141,7.747 115.189,7.747 v1(115.824,8.382) ; v1(121.031,7.62) 121.031,11.971 122.707,13.647 U1.77@122.707,19.71
/RST: C4.1 R9.2 RESET1.2 U1.14 | length 69.3
  TopLayer w0.203: v1(81.661,64.643) 85.471,64.643 ; 85.725,64.389 91.567,58.547 v1(91.567,54.229)
  TopLayer w0.508: RESET1.2@82.586,66.421 83.693,66.421 85.471,64.643 85.725,64.389
  BottomLayer w0.203: R9.2@79.197,62.865 C4.1@79.197,64.643 v1(81.661,64.643) ; v1(91.567,54.229) 97.282,54.229 99.695,51.816 99.695,49.911 98.171,48.387 98.171,38.354 98.784,37.741 100.943,37.741 101.473,37.211 101.473,28.036 102.179,27.33 106.99,27.33 107.625,27.965 U1.14@109.474,27.965
ADVREF: C32.1 CX3.2 U4.11 U5.6 | length 29.1
  TopLayer w0.203: v1(100.457,14.859) v1(100.457,11.684) 104.902,11.684 108.433,8.153 v1(108.941,8.153)
  BottomLayer w0.203: U5.6@95.758,11.049 97.028,11.049 97.663,11.684 v1(100.457,11.684) C32.1@101.827,11.684 ; v1(100.457,14.859) 100.457,16.262 CX3.2@101.981,17.786 ; v1(108.941,8.153) 108.941,10.262 110.871,12.192 U4.11@112.141,12.192
AGND: C22.2 C23.2 C24.2 C25.2 C26.2 C27.2 C28.2 C29.2 C30.2 C31.2 C32.2 C33.2 CX1.1 CX2.1 CX3.1 DB1.1 DB2.1 DB3.1 DB4.1 DB5.1 DB6.1 DB7.1 DB8.1 JP2.2 L6.2 R34.1 R36.1 R38.1 R40.1 R42.1 R44.1 R46.1 R50.2 U4.9 U4.13 U4.14 U5.4 ZA1.2 ZA2.2 ZA3.2 ZA4.2 ZA5.2 ZA6.2 ZA7.2 ZA8.2 | length 361
  TopLayer w0.254: v1(83.185,6.985) v1(83.185,10.795)
  TopLayer w1.016: ZA1.2@7,26.5 ZA2.2@20,26.5 ZA3.2@33,26.5 ZA4.2@46,26.5 ZA5.2@59,26.5 ZA6.2@72,26.5 ZA7.2@85,26.5 ZA8.2@98,26.5 100.754,26.5 103.378,23.876 v3(103.378,13.005)
  BottomLayer w0.203: 104.775,13.005 104.648,12.878 104.648,11.938 105.029,11.557 U4.9@106.426,11.557 ; U4.14@112.141,10.287 113.665,10.287 ; U4.13@112.141,10.922 113.665,10.922
  BottomLayer w0.254: R36.1@16.534,25.656 DB2.1@16.534,27.94 ; R38.1@29.534,25.656 DB3.1@29.534,27.94 ; R40.1@42.534,25.656 DB4.1@42.534,27.94 ; DB5.1@53.975,27.94 53.975,27.215 R42.1@55.534,25.656 ; R44.1@68.534,25.656 DB6.1@68.534,27.94 ; R46.1@81.534,25.656 DB7.1@81.534,27.94 ; C33.2@98.425,12.495 98.425,13.005
  BottomLayer w0.508: R34.1@3.302,25.783 4.019,26.5 ; DB1.1@3.683,27.94 3.683,26.836 4.019,26.5 ; ZA1.2@7,26.5 4.019,26.5 ; C22.2@7.696,16.764 15.494,16.764 ; C23.2@15.367,15.748 15.367,16.637 15.494,16.764 ; R36.1@16.534,25.656 17.378,26.5 ZA2.2@20,26.5 ; C24.2@23.063,15.24 23.063,16.23 23.114,16.281 ; R38.1@29.534,25.656 30.378,26.5 ZA3.2@33,26.5 ; C27.2@38.989,13.716 38.989,14.961 39.116,15.088 ; R40.1@42.534,25.656 43.378,26.5 ZA4.2@46,26.5 ; C28.2@45.974,13.716 45.974,14.707 ; R42.1@55.534,25.656 56.378,26.5 ; C29.2@58.42,11.684 58.42,12.827 58.547,12.954 ; R44.1@68.534,25.656 69.378,26.5 ZA6.2@72,26.5 ; R46.1@81.534,25.656 82.378,26.5 ZA7.2@85,26.5 ; v1(83.185,10.795) C31.2@83.185,12.27 ; CX2.1@87.63,14.478 87.63,13.64 88.265,13.005 90.043,13.005 ; R50.2@89.916,27.735 90.883,27.735 JP2.2@92.075,26.543 93.345,26.543 94.615,27.813 DB8.1@94.615,28.067 ; U5.4@90.043,12.319 90.043,13.005 ; C30.2@94.058,14.478 94.058,13.005 ; CX3.1@101.981,14.986 CX1.1@104.775,14.986 104.775,13.005 ; C32.2@103.427,11.684 103.378,11.733 v3(103.378,13.005) ; C26.2@109.396,15.24 109.396,12.827 ; 113.665,10.287 113.665,10.922 113.665,12.827 109.396,12.827 ; 15.494,16.764 16.228,16.764 16.71,16.281 23.114,16.281 ; 23.114,16.281 23.974,16.281 25.167,15.088 39.116,15.088 ; 39.116,15.088 41.726,15.088 42.107,14.707 45.974,14.707 ; 45.974,14.707 49.4,14.707 51.153,12.954 58.547,12.954 ; 58.547,12.954 62.075,12.954 68.044,6.985 v1(83.185,6.985) 83.693,6.985 86.487,4.191 101.297,4.191 C25.2@102.059,4.953 102.948,5.842 107.823,5.842 108.077,6.096 108.077,10.152 109.396,11.471 109.396,12.827 ; 90.043,13.005 94.058,13.005 ; 94.058,13.005 98.425,13.005 v3(103.378,13.005) ; v3(103.378,13.005) 104.775,13.005 ; 104.775,13.005 105.867,13.005 106.045,12.827 109.396,12.827
  BottomLayer w1.016: L6.2@53.903,54.61 56.515,54.61 57.404,53.721 57.404,32.893 55.753,31.242 55.753,27.125 56.378,26.5 ZA5.2@59,26.5
AN0: C22.1 DB1.3 R33.2 U4.1 | length 129.4
  BottomLayer w0.254: DB1.3@2.718,29.972 2.718,27.102 0.889,25.273 0.889,17.145 1.475,16.559 3.429,16.559 ; R33.2@3.683,19.509 3.683,18.415 3.456,18.188 3.456,16.586 3.429,16.559 ; C22.1@6.096,16.764 6.096,17.526 ; U4.1@106.426,6.477 101.981,6.477 100.457,4.953 86.614,4.953 83.566,8.001 67.818,8.001 62.306,13.513 51.384,13.513 49.632,15.265 42.339,15.265 41.958,15.646 25.399,15.646 24.205,16.84 16.942,16.84 16.256,17.526 6.096,17.526 ; 3.429,16.559 4.494,16.559 5.461,17.526 6.096,17.526
AN1: C23.1 DB2.3 R35.2 U4.2 | length 118.1
  TopLayer w0.254: v2(12.065,15.748) 12.065,17.399 v2(13.081,18.415) v2(13.081,20.955)
  BottomLayer w0.254: v2(12.065,15.748) C23.1@13.767,15.748 ; v2(13.081,18.415) 16.256,18.415 17.399,17.272 24.384,17.272 25.578,16.078 42.136,16.078 42.517,15.697 49.883,15.697 51.636,13.945 62.509,13.945 68.021,8.433 83.867,8.433 86.838,5.461 100.33,5.461 101.981,7.112 U4.2@106.426,7.112 ; v2(13.081,20.955) 13.081,24.382 R35.2@14.248,25.549 ; 13.359,24.56 14.248,25.449 R35.2@14.248,25.549 ; DB2.3@15.569,29.972 15.569,26.87 R35.2@14.248,25.549
AN2: C24.1 DB3.3 R37.2 U4.3 | length 108.7
  TopLayer w0.254: v2(19.685,15.24) 21.336,16.891 24.765,16.891 v2(25.781,17.907) v2(25.781,20.955)
  BottomLayer w0.254: v2(19.685,15.24) C24.1@21.463,15.24 ; v2(25.781,17.907) 28.321,17.907 29.718,16.51 42.315,16.51 42.696,16.129 50.062,16.129 51.815,14.376 62.84,14.376 68.351,8.865 84.045,8.865 87.017,5.893 100.151,5.893 102.005,7.747 U4.3@106.426,7.747 ; v2(25.781,20.955) 25.781,24.082 R37.2@27.248,25.549 ; R37.2@27.248,25.449 R37.2@27.248,25.549 ; DB3.3@28.569,29.972 28.569,26.87 R37.2@27.248,25.549
AN3: C27.1 DB4.3 R39.2 U4.4 | length 96
  TopLayer w0.254: v2(35.814,13.716) 35.814,15.875 v2(37.465,17.526) 38.862,18.923 v2(38.862,20.955)
  BottomLayer w0.254: v2(35.814,13.716) C27.1@37.389,13.716 ; v2(37.465,17.526) 41.91,17.526 42.875,16.561 50.241,16.561 51.994,14.808 63.043,14.808 68.555,9.296 84.224,9.296 87.171,6.35 99.998,6.35 102.03,8.382 U4.4@106.426,8.382 ; v2(38.862,20.955) 38.862,24.163 R39.2@40.248,25.549 ; 39.359,24.56 40.248,25.449 R39.2@40.248,25.549 ; DB4.3@41.569,29.972 41.569,26.87 R39.2@40.248,25.549
AN4: C28.1 DB5.3 R41.2 U4.5 | length 79
  TopLayer w0.254: v2(48.895,13.716) 49.657,13.716 v2(52.07,16.129) ; v2@52.07,16.164 v2(52.07,20.955)
  BottomLayer w0.254: C28.1@47.574,13.716 v2(48.895,13.716) ; v2(52.07,16.129) 55.118,16.129 56.007,15.24 63.373,15.24 68.885,9.728 84.403,9.728 87.35,6.782 99.819,6.782 102.054,9.017 U4.5@106.426,9.017 ; v2(52.07,20.955) 52.07,24.271 53.248,25.449 R41.2@53.248,25.549 53.248,26.635 53.01,26.873 DB5.3@53.01,29.972
AN5: C29.1 DB6.3 R43.2 U4.6 | length 68.2
  TopLayer w0.254: v2(61.595,11.684) 62.149,11.684 v2(65.324,14.859) ; v2(65.324,19.223) v2(65.324,14.859) ; v2@65.37,14.605 65.324,14.651 v2(65.324,14.859)
  BottomLayer w0.254: C29.1@60.02,11.684 v2(61.595,11.684) ; v2(65.324,14.859) 70.023,10.16 84.582,10.16 87.528,7.214 99.64,7.214 102.078,9.652 U4.6@106.426,9.652 ; v2(65.324,19.223) 65.359,19.223 65.359,24.56 66.248,25.449 R43.2@66.248,25.549 67.569,26.87 DB6.3@67.569,29.972
AN6: C31.1 DB7.3 R45.2 U4.7 | length 47.7
  TopLayer w0.254: v2(79.756,19.177) 80.899,18.034 80.899,16.891 v2(82.55,15.24)
  BottomLayer w0.254: v2(79.756,19.177) 78.359,20.574 78.359,24.56 R45.2@79.248,25.449 79.248,25.908 80.569,27.229 DB7.3@80.569,29.972 ; v2(82.55,15.24) 82.55,13.97 82.65,13.87 C31.1@83.185,13.87 83.92,13.87 84.9,12.89 84.9,10.477 87.732,7.645 99.461,7.645 102.103,10.287 U4.7@106.426,10.287
AN7: C33.1 DB8.3 R49.2 U4.8 | length 49.1
  TopLayer w0.254: v1(95.504,17.653) 97.409,17.653 99.314,15.748 99.314,11.557 v1(99.949,10.922)
  BottomLayer w0.254: DB8.3@93.65,30.099 93.65,31.75 92.507,32.893 90.424,32.893 88.646,31.115 88.646,18.034 89.357,17.323 93.218,17.323 93.548,17.653 v1(95.504,17.653) 95.504,19.607 R49.2@94.615,20.496 ; C33.1@98.452,10.922 v1(99.949,10.922) U4.8@106.426,10.922
AVC3: DB1.2 DB2.2 DB3.2 DB4.2 DB5.2 DB6.2 DB7.2 DB8.2 F6.2 F10.2 L5.2 | length 189.4
  TopLayer w0.508: v2(4.318,32.004) v2(13.208,32.004) v2(26.208,32.004) v2(39.208,32.004) v3(65.208,32.004) v2(79.121,32.004) v3(87.63,32.004) v2(91.694,32.004)
  BottomLayer w0.254: DB1.2@1.778,27.94 1.778,30.607 3.175,32.004 v2(4.318,32.004) ; v2(13.208,32.004) 14.629,30.583 DB2.2@14.629,27.94 ; v2(26.208,32.004) 27.629,30.583 DB3.2@27.629,27.94 ; v2(39.208,32.004) 40.629,30.583 DB4.2@40.629,27.94 ; DB5.2@52.07,27.94 52.208,28.078 v2@52.208,32.004 ; v3(65.208,32.004) 66.629,30.583 66.629,27.986 DB6.2@66.675,27.94 ; v2(79.121,32.004) 79.121,31.091 79.629,30.583 DB7.2@79.629,27.94 ; v2(91.694,32.004) 91.694,29.083 DB8.2@92.71,28.067
  BottomLayer w0.762: L5.2@58.348,58.166 58.348,58.379 L5.2@58.42,58.451 ; L5.2@58.674,58.166 58.674,38.354 65.024,32.004 v3(65.208,32.004) ; v3(87.63,32.004) 87.757,32.004 87.757,17.526 88.646,16.637 99.441,16.637 100.711,17.907 100.711,20.574 101.092,20.955 F6.2@103.075,20.955 ; F10.2@99.236,14.478 99.236,16.432
  other v2: 52.07,32.004
BOOT0: R1.1 U1.94 | length 4.7
  BottomLayer w0.203: R1.1@113.692,15.24 113.692,16.664 114.224,17.196 U1.94@114.224,19.71
BUSY: U1.88 U4.16 | length 18.6
  TopLayer w0.203: v1(114.681,9.017) 114.681,8.001 115.443,7.239 v1(116.586,7.239)
  BottomLayer w0.203: U4.16@112.141,9.017 v1(114.681,9.017) ; v1(116.586,7.239) 117.221,7.874 117.221,13.716 117.094,13.843 117.094,15.367 117.221,15.494 U1.88@117.221,19.71
CLK: R2.2 U1.12 | length 18.5
  BottomLayer w0.203: R2.2@99.771,37.062 99.771,35.611 101.092,34.29 101.092,27.878 102.021,26.949 U1.12@109.474,26.949
D_RXD: R7.2 U1.56 | length 112.4
  TopLayer w0.203: v1(67.183,69.088) 68.072,69.088 68.453,69.469 121.156,69.469 121.92,68.705 v1(121.92,67.31) ; v1(127.635,42.672) 128.397,43.434 128.397,44.196 v1(129.286,45.085)
  BottomLayer w0.203: R7.2@66.167,55.88 67.183,56.896 v1(67.183,69.088) ; v1(121.92,67.31) 121.92,65.659 123.952,63.627 123.952,61.468 129.032,56.388 129.032,53.086 129.286,52.832 v1(129.286,45.085) ; U1.56@124.968,30.963 126.624,30.963 127.152,31.491 127.152,42.189 v1(127.635,42.672)
D_TXD: R6.2 U1.55 | length 106
  TopLayer w0.203: v1(66.167,68.491) 68.491,68.491 69.088,69.088 119.888,69.088 120.65,68.326 v1(120.65,67.31) ; v1(127.381,43.561) 127.381,45.085 v1(128.016,45.72)
  BottomLayer w0.203: R6.2@66.167,59.69 v1(66.167,68.491) ; v1(120.65,67.31) 120.65,65.278 121.158,64.77 121.158,61.722 126.492,56.388 126.492,53.975 128.016,52.451 v1(128.016,45.72) ; U1.55@124.968,31.445 126.568,31.445 126.771,31.648 126.771,42.951 v1(127.381,43.561)
DCLK: U1.89 U4.19 | length 16.5
  BottomLayer w0.203: U4.19@112.141,7.112 115.57,7.112 116.713,8.255 U1.89@116.713,19.71
DD0: C41.1 F19.1 R81.1 U1.15 | length 104.8
  TopLayer w0.203: v1(25.31,49.276) 32.72,49.276 35.641,46.355 94.361,46.355 v1(102.87,37.846)
  BottomLayer w0.203: F19.1@24.13,47.371 24.13,49.276 v1(25.31,49.276) R81.1@26.489,49.276 ; v1(102.87,37.846) 102.87,37.338 101.854,36.322 101.854,28.194 102.337,27.711 106.832,27.711 107.594,28.473 U1.15@109.474,28.473
DD1: C40.1 F18.1 R77.1 U1.23 | length 89.8
  TopLayer w0.203: v1(33.565,49.276) 36.105,46.736 94.9,46.736 103.155,38.481 106.172,38.481 106.807,37.846 v1(107.188,37.846)
  BottomLayer w0.203: F18.1@32.385,47.371 32.385,49.276 v1(33.565,49.276) R77.1@34.744,49.276 ; v1(107.188,37.846) 107.188,33.274 108.001,32.461 U1.23@109.474,32.461
DD2: C39.1 F17.1 R73.1 U1.26 | length 77.7
  TopLayer w0.203: v1(44.31,49.276) 46.469,47.117 95.123,47.117 103.378,38.862 107.823,38.862 v1(108.839,37.846)
  BottomLayer w0.203: F17.1@43.13,47.371 43.13,49.276 v1(44.31,49.276) R73.1@45.489,49.276 ; v1(108.839,37.846) 108.839,36.83 109.283,36.386 109.918,36.386 110.871,35.433 111.227,35.433 U1.26@111.227,35.204
DD3: C38.1 F16.1 R69.1 U1.29 | length 71.8
  TopLayer w0.203: v1(52.565,49.276) 54.343,47.498 95.281,47.498 103.536,39.243 111.252,39.243 v1(111.887,38.608)
  BottomLayer w0.203: F16.1@51.385,47.371 51.385,49.276 v1(52.565,49.276) R69.1@53.744,49.276 ; v1(111.887,38.608) 112.649,37.846 112.649,36.398 112.725,36.322 U1.29@112.725,35.204
DD4: C37.1 F15.1 R65.1 U1.30 | length 61.8
  TopLayer w0.203: v1(63.309,49.276) 64.706,47.879 95.439,47.879 103.694,39.624 111.887,39.624 v1(112.776,38.735)
  BottomLayer w0.203: F15.1@62.13,47.371 C37.1@62.13,49.276 v1(63.309,49.276) R65.1@64.489,49.276 ; v1(112.776,38.735) 113.157,38.354 113.157,36.672 113.233,36.596 U1.30@113.233,35.204
DD5: C36.1 F14.1 R61.1 U1.31 | length 54.5
  TopLayer w0.203: v1(71.564,49.276) 72.581,48.26 95.596,48.26 103.763,40.094 112.687,40.094 v1(113.538,39.243)
  BottomLayer w0.203: F14.1@70.385,47.371 C36.1@70.385,49.276 v1(71.564,49.276) R61.1@72.744,49.276 ; v1(113.538,39.243) 113.538,36.83 113.716,36.652 U1.31@113.716,35.204
DD6: C35.1 F13.1 R57.1 U1.35 | length 45.9
  TopLayer w0.203: v1(81.81,49.276) 82.445,48.641 95.754,48.641 103.92,40.475 113.322,40.475 v1(115.951,37.846)
  BottomLayer w0.203: F13.1@80.63,47.371 80.63,49.276 v1(81.81,49.276) R57.1@82.989,49.276 ; U1.35@115.722,35.204 115.722,36.855 115.951,37.084 v1(115.951,37.846)
DD7: C34.1 F12.1 R53.1 U1.36 | length 38.8
  TopLayer w0.203: v1(90.065,49.276) 95.658,49.276 104.078,40.856 114.16,40.856 v1(116.624,38.392)
  BottomLayer w0.203: F12.1@88.885,47.371 88.885,49.276 v1(90.065,49.276) R53.1@91.244,49.276 ; U1.36@116.23,35.204 116.23,36.601 116.624,36.995 v1(116.624,38.392) v1@116.713,38.481
DG1: R80.1 R82.1 ZD4.4 | length 6.2
  BottomLayer w0.356: R80.1@22.325,43.788 24.582,43.788 R82.1@24.609,43.815 ; ZD4.4@24.5,40 ZD4.4@24.609,40.109
  BottomLayer w0.508: ZD4.4@24.609,40.109 R82.1@24.609,43.815
DG2: R76.1 R78.1 ZD4.2 | length 6.6
  BottomLayer w0.356: R76.1@30.58,43.761 R78.1@32.837,43.761
  BottomLayer w0.508: ZD4.2@31.5,40 31.5,42.424 R78.1@32.837,43.761
DG3: R72.1 R74.1 ZD3.4 | length 6.2
  BottomLayer w0.356: R72.1@41.325,43.788 43.582,43.788 R74.1@43.609,43.815 ; ZD3.4@43.5,40 ZD3.4@43.609,40.109
  BottomLayer w0.508: ZD3.4@43.609,40.109 R74.1@43.609,43.815
DG4: R68.1 R70.1 ZD3.2 | length 6.6
  BottomLayer w0.356: R68.1@49.58,43.761 R70.1@51.837,43.761
  BottomLayer w0.508: ZD3.2@50.5,40 50.5,42.424 R70.1@51.837,43.761
DG5: R64.1 R66.1 ZD2.4 | length 6.2
  BottomLayer w0.356: R64.1@60.325,43.788 62.582,43.788 R66.1@62.609,43.815 ; ZD2.4@62.5,40 ZD2.4@62.609,40.109
  BottomLayer w0.508: ZD2.4@62.609,40.109 R66.1@62.609,43.815
DG6: R60.1 R62.1 ZD2.2 | length 6.6
  BottomLayer w0.356: R60.1@68.58,43.761 R62.1@70.837,43.761
  BottomLayer w0.508: ZD2.2@69.5,40 69.5,42.424 R62.1@70.837,43.761
DG7: R56.1 R58.1 ZD1.5 | length 6.2
  BottomLayer w0.356: R56.1@78.825,43.788 81.082,43.788 R58.1@81.109,43.815 ; ZD1.5@81,40 ZD1.5@81.109,40.109
  BottomLayer w0.508: ZD1.5@81.109,40.109 R58.1@81.109,43.815
DG8: R52.1 R54.1 ZD1.3 | length 6.6
  BottomLayer w0.356: R52.1@87.08,43.761 R54.1@89.337,43.761
  BottomLayer w0.508: ZD1.3@88,40 88,42.424 R54.1@89.337,43.761
DIN: U1.90 U4.17 | length 14.6
  BottomLayer w0.203: U4.17@112.141,8.382 114.935,8.382 116.205,9.652 U1.90@116.205,19.71
DL0: DL1.A U1.47 | length 103.7
  TopLayer w0.203: DL1.A@25.8,34.5 27.153,33.147 99.695,33.147 101.092,34.544 121.285,34.544 121.92,35.179 v1(121.92,38.227)
  BottomLayer w0.203: U1.47@121.717,35.204 121.717,36.754 121.92,36.957 v1(121.92,38.227)
DL1: DL2.A U1.46 | length 94.6
  TopLayer w0.203: DL2.A@32.8,34.5 33.772,33.528 99.537,33.528 100.934,34.925 120.904,34.925 121.285,35.306 v1(121.285,37.719)
  BottomLayer w0.203: U1.46@121.234,35.204 121.234,36.906 121.285,36.957 v1(121.285,37.719)
DL2: DL3.A U1.40 | length 76.7
  TopLayer w0.203: DL3.A@44.8,34.5 45.479,35.179 51.689,35.179 53.721,37.211 116.713,37.211 v1(117.221,37.719)
  BottomLayer w0.203: v1(117.221,37.719) 117.221,37.465 118.237,36.449 U1.40@118.237,35.204
DL3: DL4.A U1.41 | length 72
  TopLayer w0.203: DL4.A@51.8,34.5 54.13,36.83 117.348,36.83 117.856,37.338 v1(117.856,38.481)
  BottomLayer w0.203: v1(117.856,38.481) 117.856,37.465 118.72,36.601 U1.41@118.72,35.204
DL4: DL5.A U1.42 | length 59.4
  TopLayer w0.203: DL5.A@63.8,34.5 65.749,36.449 118.237,36.449 118.491,36.703 v1(118.491,37.719)
  BottomLayer w0.203: v1(118.491,37.719) 118.506,37.704 118.506,37.353 119.228,36.632 U1.42@119.228,35.204
DL5: DL6.A U1.43 | length 54.1
  TopLayer w0.203: DL6.A@70.8,34.5 72.368,36.068 118.999,36.068 119.253,36.322 v1(119.253,38.1)
  BottomLayer w0.203: v1(119.253,38.1) 119.253,37.496 119.736,37.013 U1.43@119.736,35.204
DL6: DL7.A U1.44 | length 42.7
  TopLayer w0.203: DL7.A@82.3,34.5 83.487,35.687 119.761,35.687 120.015,35.941 v1(120.015,37.719)
  BottomLayer w0.203: v1(120.015,37.719) 120.015,37.273 120.218,37.069 U1.44@120.218,35.204
DL7: DL8.A U1.45 | length 37.4
  TopLayer w0.203: DL8.A@89.3,34.5 90.106,35.306 120.142,35.306 120.65,35.814 v1(120.65,38.227)
  BottomLayer w0.203: v1(120.65,38.227) 120.65,37.033 120.726,36.957 U1.45@120.726,35.204
DOUT: U1.91 U4.15 | length 13.4
  BottomLayer w0.203: U4.15@112.141,9.652 115.316,9.652 115.722,10.058 U1.91@115.722,19.71
E_CRS_DV: R26.1 U1.32 | length 5.5
  BottomLayer w0.203: R26.1@114.046,40.613 114.046,39.751 114.224,39.573 U1.32@114.224,35.204
E_MDC: U1.16 U2.13 | length 38.4
  TopLayer w0.203: v1(109.601,45.72) 111.252,44.069 v1(111.887,44.069)
  BottomLayer w0.203: U1.16@109.474,28.956 107.442,28.956 106.578,28.092 102.718,28.092 102.362,28.448 102.362,36.291 103.467,37.396 103.467,44.285 104.267,45.085 108.966,45.085 v1(109.601,45.72) ; v1(111.887,44.069) 111.887,45.466 113.304,46.883 U2.13@114.715,46.883
E_MDIO: R16.1 U1.25 U2.12 | length 19.2
  BottomLayer w0.203: U1.25@109.474,33.452 108.166,34.76 108.166,42.507 108.612,42.953 109.982,42.953 R16.1@110.744,43.715 111.279,43.18 113.284,43.18 115.59,45.486 U2.12@115.59,46.008
E_OSC: R29.1 U1.67 | length 24.5
  TopLayer w0.203: v1(123.317,40.386) 124.968,38.735 v1(129.54,38.735)
  BottomLayer w0.203: R29.1@122.174,40.613 122.709,40.613 122.936,40.386 v1(123.317,40.386) ; U1.67@124.968,25.451 126.924,25.451 129.54,28.067 v1(129.54,38.735)
E_REF_CLK: R19.1 U1.24 U2.14 | length 20.5
  BottomLayer w0.203: U1.24@109.474,32.969 108.128,32.969 107.785,33.312 107.785,43.396 108.104,43.715 R19.1@109.093,43.715 112.761,47.383 U2.14@114.715,47.383
E_RST: U1.17 U2.15 | length 35.3
  BottomLayer w0.203: U1.17@109.474,29.464 107.315,29.464 106.324,28.473 103.353,28.473 102.743,29.083 102.743,36.085 103.848,37.19 103.848,44.031 104.394,44.577 109.416,44.577 112.722,47.883 U2.15@114.715,47.883
E_RXD0: R23.1 U1.33 | length 5.8
  BottomLayer w0.203: U1.33@114.732,35.204 114.732,38.786 115.57,39.624 R23.1@115.57,40.613
E_RXD1: R24.1 U1.34 | length 8.4
  BottomLayer w0.203: U1.34@115.214,35.204 115.214,38.606 115.978,39.37 118.491,39.37 118.872,39.751 R24.1@118.872,40.613
E_TX_EN: U1.48 U2.16 | length 27.3
  TopLayer w0.203: v1(110.363,46.482) 114.173,42.672 120.65,42.672 v1(121.285,43.307)
  BottomLayer w0.203: v1(110.363,46.482) 110.617,46.736 111.036,46.736 112.683,48.383 U2.16@114.715,48.383 ; v1(121.285,43.307) 121.285,39.116 121.577,38.824 122.466,38.824 122.682,38.608 122.682,37.084 122.225,36.627 U1.48@122.225,35.204
E_TXD0: U1.51 U2.17 | length 32.7
  TopLayer w0.203: v1(110.744,47.371) 114.211,43.904 115.608,43.904 116.078,43.434 119.253,43.434 120.142,44.323 122.555,44.323 122.936,43.942 v1(124.46,43.942)
  BottomLayer w0.203: v1(110.744,47.371) 110.744,47.498 110.998,47.752 111.379,47.752 112.51,48.883 U2.17@114.715,48.883 ; v1(124.46,43.942) 125.476,43.942 125.984,43.434 125.984,35.56 124.968,34.544 U1.51@124.968,33.452